# Altium PCB DM0250.PcbDoc (part 1 of 2)
Units mm, origin at the board's own origin, x right, y up, seen from the top; angles counter-clockwise.
Board outline 25 x 23.86 mm, 4 copper layers (Top Copper, Signal Layer 1, Layer 1, Bottom Layer), stack 1.602 mm thick; 45 components, 21 nets, 142 pads, 71 vias.
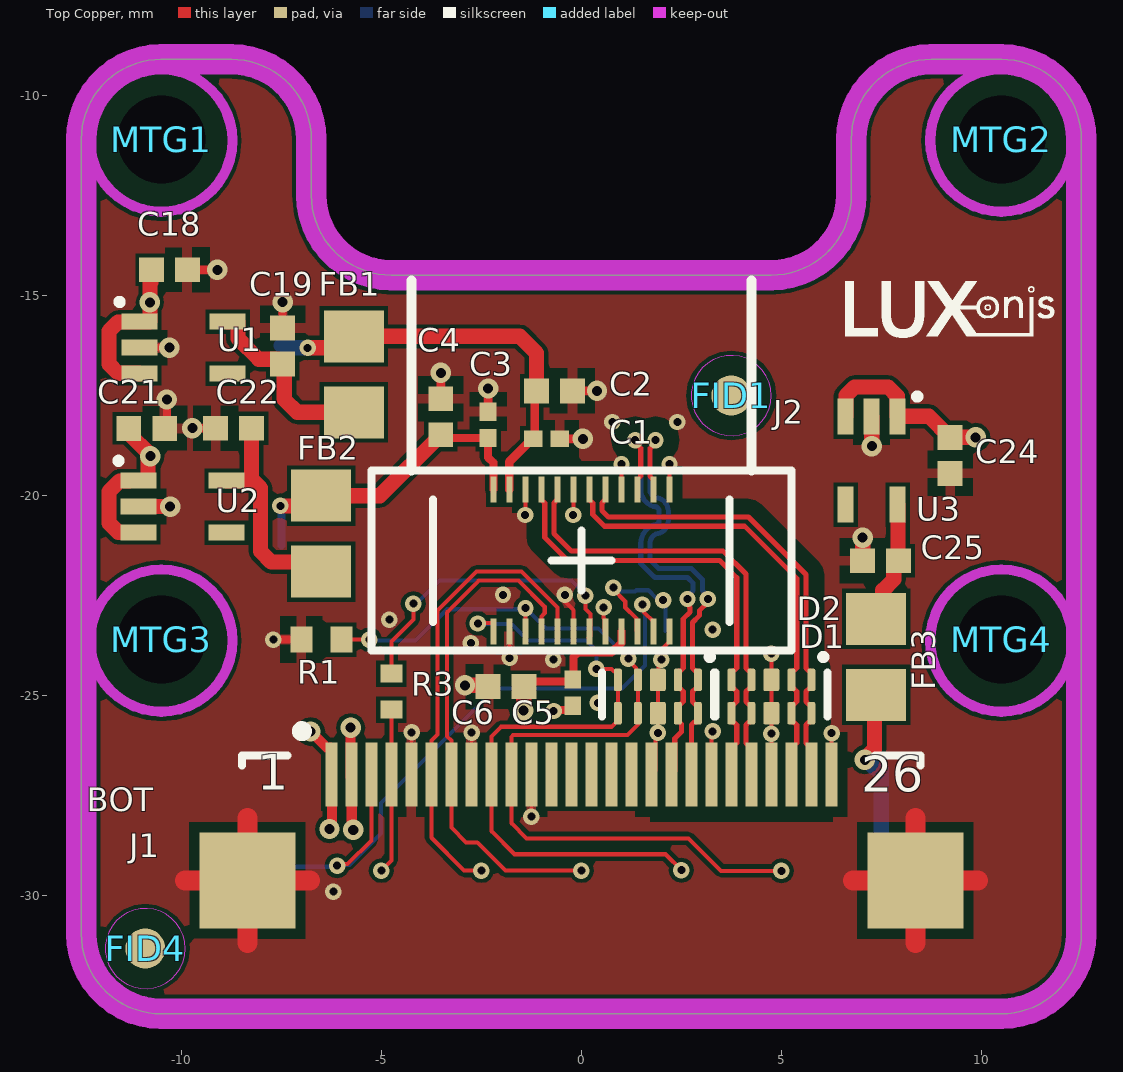
[diagram p0: Top Copper view]
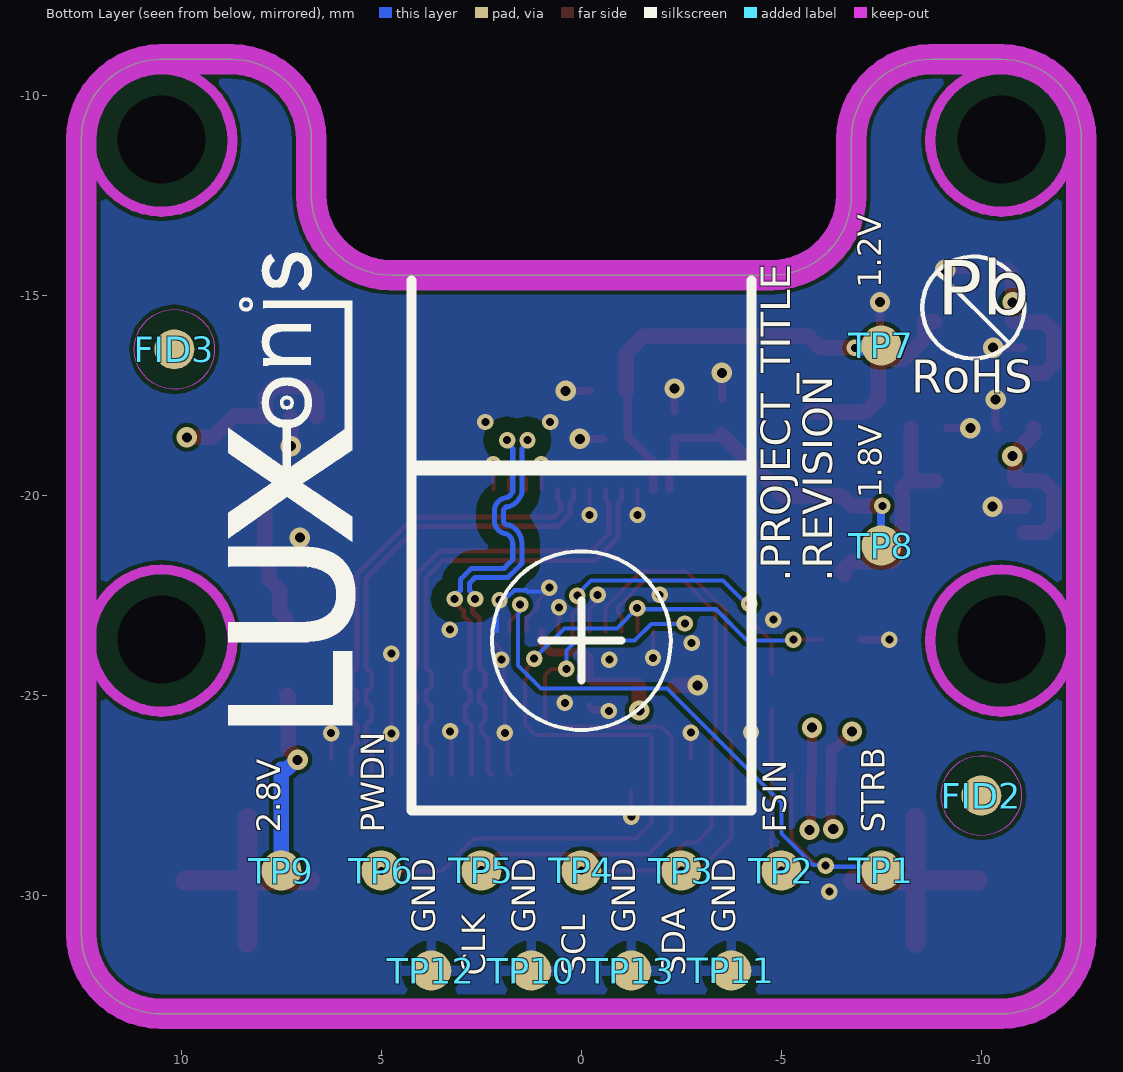
[diagram p1: Bottom Layer view, seen from below]
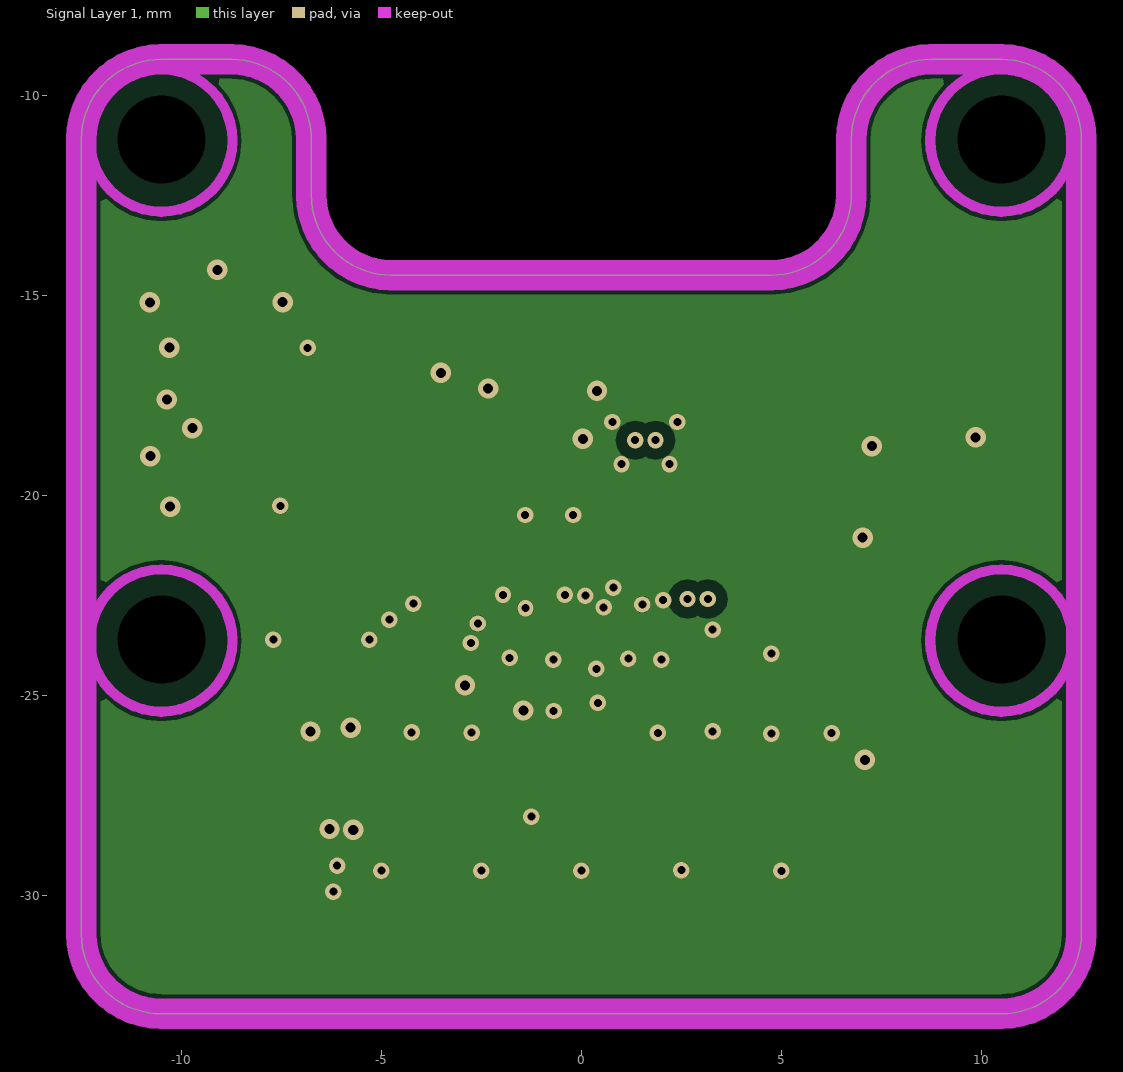
[diagram p2: Signal Layer 1]
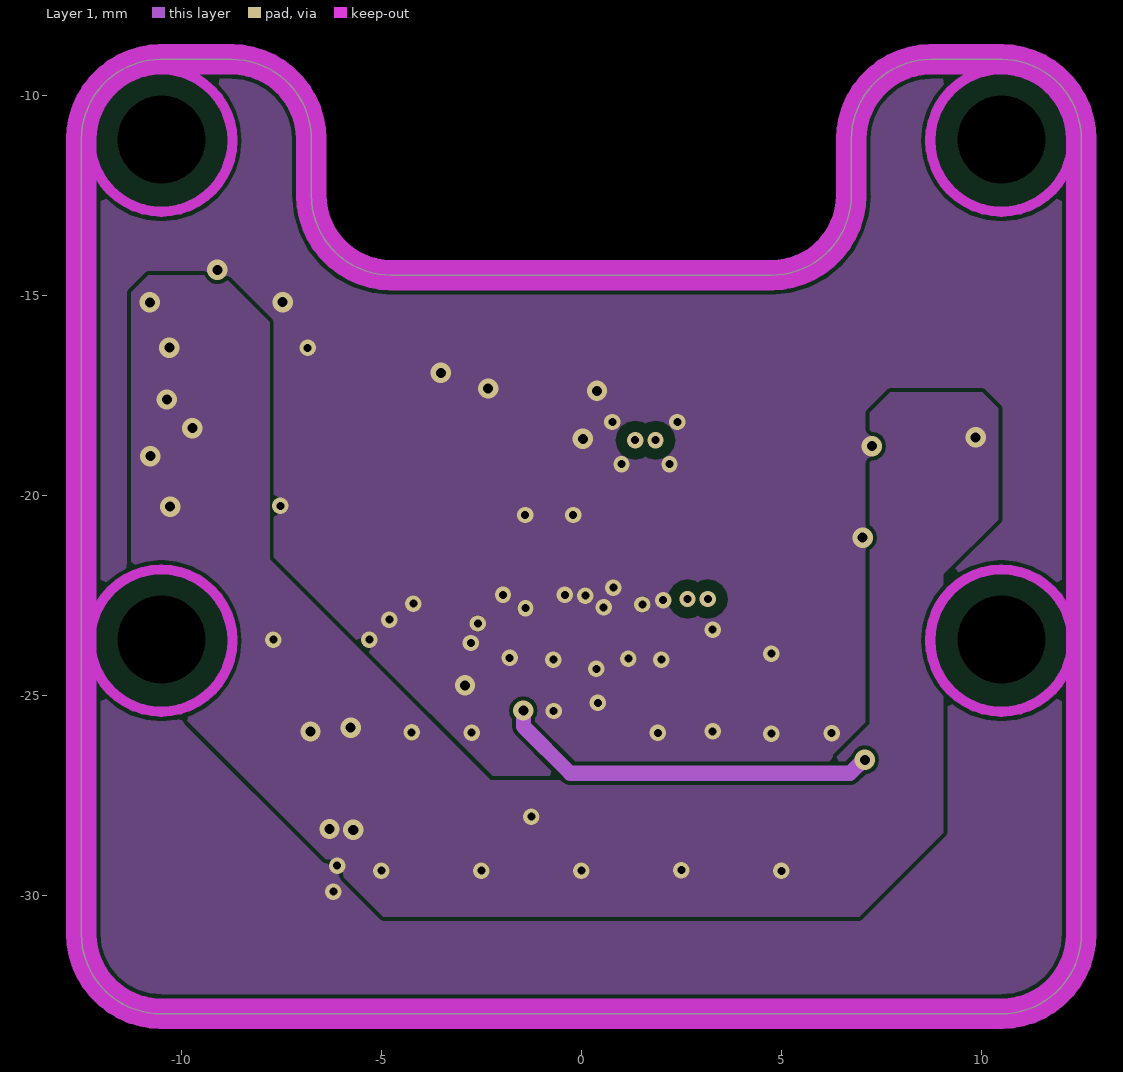
[diagram p3: Layer 1]

## Layer stack, top to bottom
Top Mask: solder mask 0.018, Solder Resist, Dk 4.2
Top Copper: signal copper 0.0356
Dielectric 1: prepreg 0.18, PP-021, Dk 4.2
Signal Layer 1: signal copper 0.0356
Core: core 1.1, Core-042, Dk 4.2
Layer 1: signal copper 0.0356
Dielectric 2: prepreg 0.18, PP-021, Dk 4.2
Bottom Layer: signal copper 0.0356
Bottom Solder: solder mask 0.018, Solder Resist, Dk 4.2

## Board outline
-12.5,-30.956 ccw(c-10.5,-30.956) -10.5,-32.956 10.5,-32.956 ccw(c10.5,-30.956) 12.5,-30.956 12.5,-11.1 12.5,-11.094 ccw(c10.5,-11.094) 10.5,-9.094 8.745,-9.094 8.75,-9.094 ccw(c8.75,-11.094) 6.75,-11.094 6.75,-12.49 cw(c4.75,-12.49) 4.75,-14.49 -4.75,-14.49 cw(c-4.75,-12.49) -6.75,-12.49 -6.75,-11.094 ccw(c-8.75,-11.094) -8.75,-9.094 -8.745,-9.094 -10.5,-9.094 ccw(c-10.5,-11.094) -12.5,-11.094

## Design rules (kind name [scope] priority, off if disabled: settings)
AssemblyTestPointUsage [All] p1: valid=2
AssemblyTestpoint [(IsPad And (OnTopLayer Or OnBottomLayer)) Or (IsVia) Or (IsPad And OnMultiLayer)] p1: testpointundercomponent=FALSE minsize=0.381 maxsize=2.54 preferedsize=1.524 minholesize=0 maxholesize=2.54 preferedholesize=0.813 testpointgrid=0.025 usegrid=FALSE gridtolerance=0 allowsidebottom=TRUE
BoardOutlineClearance [not InPolygonClass('ToEdge')] p1: gap=0.381 ignorepadtopadclearanceinfootprint=FALSE
Clearance DIFF_PAIR_GND [InPolygon vs InAnyDifferentialPair] p1: gap=0.381 ignorepadtopadclearanceinfootprint=FALSE
Clearance [All] p2: gap=0.1 ignorepadtopadclearanceinfootprint=FALSE
ComponentClearance [HasFootprint('FIDUCIAL_ROUND_1MM') or HasFootprint('TP100_200_NS') vs HasFootprint('FIDUCIAL_ROUND_1MM') or HasFootprint('TP100_200_NS')] p1: gap=-0.003 collisioncheckmode=3 verticalgap=2540 showdistances=FALSE
DiffPairsRouting 90ohm [InDifferentialPairClass('USB3')] p1: maxlimit=0.254 minlimit=0.102 mostfreqgap=0.254 toplayer_maxgap=0.102 toplayer_prefgap=0.102 toplayer_minwidth=0.178 toplayer_maxwidth=0.178 toplayer_prefwidth=0.178 midlayer1_minwidth=0.381 midlayer1_maxwidth=0.381 midlayer1_prefwidth=0.381 midlayer2_minwidth=0.381 midlayer2_maxwidth=0.381 midlayer2_prefwidth=0.381 bottomlayer_maxgap=0.102 bottomlayer_prefgap=0.102 bottomlayer_minwidth=0.178 bottomlayer_maxwidth=0.178 bottomlayer_prefwidth=0.178 impedanceprofiledriven=TRUE impedanceprofileid={88523433-C968-46F5-BAB2-5A945F0074AC} maxuncoupledlength=12.7
DiffPairsRouting 100ohm [InDifferentialPairClass('100ohm')] p2: maxlimit=0.254 minlimit=0.102 mostfreqgap=0.254 toplayer_maxgap=0.102 toplayer_prefgap=0.102 toplayer_minwidth=0.127 toplayer_maxwidth=0.127 toplayer_prefwidth=0.127 midlayer1_minwidth=0.381 midlayer1_maxwidth=0.381 midlayer1_prefwidth=0.381 midlayer2_minwidth=0.381 midlayer2_maxwidth=0.381 midlayer2_prefwidth=0.381 bottomlayer_maxgap=0.102 bottomlayer_prefgap=0.102 bottomlayer_minwidth=0.127 bottomlayer_maxwidth=0.127 bottomlayer_prefwidth=0.127 impedanceprofiledriven=TRUE impedanceprofileid={23EE4AC3-2669-4576-8364-9EC6BF9A4921} maxuncoupledlength=12.7
FabricationTestPointUsage [All] p1: valid=2 allowmultiple=TRUE
FabricationTestpoint [(IsPad And (OnTopLayer Or OnBottomLayer)) Or (IsVia) Or (IsPad And OnMultiLayer)] p1: side=3 testpointundercomponent=TRUE minsize=0.508 maxsize=2.54 preferedsize=1.524 minholesize=0 maxholesize=1.016 preferedholesize=0.813 testpointgrid=0.025 allowsidetop=TRUE allowsidebottom=TRUE usegrid=FALSE gridtolerance=0
HoleSize [All] p1: absolutevalues=TRUE maxlimit=25.4 minlimit=0.2 maxpercent=80.000 minpercent=20.000
HoleToHoleClearance [All] p1: gap=0.254 allowstackedmicrovias=FALSE
MatchedLengths "Schematic Matched Net Lengths_1" [InNetClass('SENSOR1MIPI')] p1: tolerance=0.127 checknetsindiffpair=TRUE checkdiffpairvsdiffpair=FALSE checkxsignals=FALSE checkothers=FALSE usedelayunits=TRUE delaytolerance=0.500000
MatchedLengths "Schematic Matched Net Lengths" [InNetClass('SENSOR1MIPI')] p2: tolerance=0.025 checknetsindiffpair=FALSE checkdiffpairvsdiffpair=TRUE checkxsignals=TRUE checkothers=TRUE usedelayunits=TRUE delaytolerance=1.000000
MinimumSolderMaskSliver [not (HasFootprint('DF40HC-3.0-100DS-0.4V_minpad') or HasFootprint('TPD4E02B04DQAR') or HasFootprint('105450-0101'))] p1: minsoldermaskwidth=0.076
PolygonConnect [All] p1: thpad.connectstyle=Direct thpad.reliefconductorwidth=0.254 thpad.reliefentries=4 thpad.polygonreliefangle="90 Angle" thpad.airgapwidth=0.254 smdpad.connectstyle=Relief smdpad.reliefconductorwidth=0.254 smdpad.reliefentries=4 smdpad.polygonreliefangle="90 Angle" smdpad.airgapwidth=0.254 via.connectstyle=Direct via.reliefconductorwidth=0.254 via.reliefentries=4 via.polygonreliefangle="90 Angle" via.airgapwidth=0.254
RoutingVias [All] p1: holewidth=0.254 width=0.508 viastyle="Through Hole" minholewidth=0.2 minwidth=0.4 maxholewidth=25.4 maxwidth=25.4
SilkToSilkClearance [All] p1: silktosilkclearance=0.025
SilkToSolderMaskClearance [InPadClass('All Pads')] p1: minsilkscreentomaskgap=0 clearancetoexposedcopper=FALSE
SolderMaskExpansion [All] p1: expansion=0.102 istentingtop=FALSE
UnRoutedNet [All] p1: checkbadconnections=TRUE
Width [All] p1: maxlimit=1 minlimit=0.102 preferedwidth=0.254
18 further rules are at their usual default settings.

## Classes and differential pairs
net class SENSOR1MIPI: CAM1_C_N CAM1_C_P CAM1_D0_N CAM1_D0_P CAM1_D1_N CAM1_D1_P
component class DM0250_Power: C18 C19 C21 C22 C24 C25 FB1 FB2 FB3 TP7 TP8 TP9 TP10 TP11 TP12 TP13 U1 U2 U3
component class DM0250_OV9282: C1 C2 C3 C4 C5 C6 D1 D2 FID1 FID2 FID3 FID4 J1 J2 MTG1 MTG2 MTG3 MTG4 R1 R3 TP1 TP2 TP3 TP4 TP5 TP6
differential pair CAM1_D1: +CAM1_D1_P -CAM1_D1_N
differential pair CAM1_D0: +CAM1_D0_P -CAM1_D0_N
differential pair CAM1_C: +CAM1_C_P -CAM1_C_N

## Components (designator, comment, footprint, x,y, rotation, side; value= is the part's Value field where it differs from the comment)
C1 "0.1uF 0201" CAPC0201(0603)33_N -0.872,-18.58 r180 top
C2 "10uF 0402" CAPC0402(1005)70_N -0.672,-17.383 r180 top
C3 "0.1uF 0201" CAPC0201(0603)33_N -2.33,-18.23 r270 top
C4 "10uF 0402" CAPC0402(1005)70_N -3.512,-18.03 r270 top
C5 "0.1uF 0201" CAPC0201(0603)33_N -0.212,-24.927 r90 top
C6 "10uF 0402" CAPC0402(1005)70_N -1.88,-24.775 r0 top
C18 "10uF 0402" CAPC0402(1005)70_N -10.297,-14.355 r180 top
C19 "10uF 0402" CAPC0402(1005)70_N -7.468,-16.262 r270 top
C21 "10uF 0402" CAPC0402(1005)70_N -10.865,-18.32 r180 top
C22 "10uF 0402" CAPC0402(1005)70_N -8.692,-18.315 r0 top
C24 "10uF 0402" CAPC0402(1005)70_N 9.22,-18.995 r90 top
C25 "10uF 0402" CAPC0402(1005)70_N 7.48,-21.628 r0 top
D1 "TPD4E02B04DQAR" TPD4E02B04DQAR 4.75,-25.025 r180 top
D2 "TPD4E02B04DQAR" TPD4E02B04DQAR 1.913,-25.025 r180 top
FB1 "600R/100MHz" 2508056017Y2 -5.685,-16.97 r90 top
FB2 "600R/100MHz" 2508056017Y2 -6.508,-20.953 r90 top
FB3 "600R/100MHz" 2508056017Y2 7.368,-24.03 r270 top
FID1 "FIDUCIAL_ROUND_1MM" FIDUCIAL_ROUND_1MM 3.75,-17.5 r0 top
FID2 "FIDUCIAL_ROUND_1MM" FIDUCIAL_ROUND_1MM -10,-27.5 r90 bottom
FID3 "FIDUCIAL_ROUND_1MM" FIDUCIAL_ROUND_1MM 10.174,-16.345 r90 bottom
FID4 "FIDUCIAL_ROUND_1MM" FIDUCIAL_ROUND_1MM -10.9,-31.325 r90 top
J1 "FLEX CONNECTOR, 0.50MM PITCH, HE" F32R-1A7H1-11026 0,-28.201 r0 top
J2 "BBR43-24KB533 for camera module TG161B-201" "TG161B-201 / AN01V32 - Board Wrap" 0,-21.625 r180 top locked
MTG1 "" MOUNTING_HOLE_M2_RPI_CAM -10.5,-11.094 r90 top locked
MTG2 "" MOUNTING_HOLE_M2_RPI_CAM 10.5,-11.094 r90 top locked
MTG3 "" MOUNTING_HOLE_M2_RPI_CAM -10.5,-23.594 r90 top locked
MTG4 "" MOUNTING_HOLE_M2_RPI_CAM 10.5,-23.594 r90 top locked
R1 "10K 0402" RESC0402(1005)_N -6.5,-23.6 r180 top
R3 "0R 0402" RESC0402(1005)_L -4.75,-24.901 r270 top
TP1 "TP100_150_NS" TP100_150_NS -7.5,-29.375 r180 bottom
TP2 "TP100_150_NS" TP100_150_NS -5,-29.375 r90 bottom
TP3 "TP100_150_NS" TP100_150_NS -2.5,-29.375 r90 bottom
TP4 "TP100_150_NS" TP100_150_NS 0,-29.375 r90 bottom
TP5 "TP100_150_NS" TP100_150_NS 2.5,-29.375 r90 bottom
TP6 "TP100_150_NS" TP100_150_NS 5,-29.375 r90 bottom
TP7 "TP100_150_NS" TP100_150_NS -7.5,-16.25 r270 bottom
TP8 "TP100_150_NS" TP100_150_NS -7.5,-21.25 r180 bottom
TP9 "TP100_150_NS" TP100_150_NS 7.5,-29.375 r180 bottom
TP10 "TP100_150_NS" TP100_150_NS 1.25,-31.875 r90 bottom
TP11 "TP100_150_NS" TP100_150_NS -3.75,-31.875 r90 bottom
TP12 "TP100_150_NS" TP100_150_NS 3.75,-31.875 r90 bottom
TP13 "TP100_150_NS" TP100_150_NS -1.25,-31.875 r90 bottom
U1 "TLV70012DCK" TLV70012DCK -9.945,-16.302 r270 top
U2 "TLV70018DCK" TLV70018DCK -9.97,-20.275 r270 top
U3 "TLV70028DCK" TLV70028DCK 7.255,-19.128 r180 top

## Footprints (in the part's own frame and the unit in brackets; to place one, negate y for a bottom-side part, rotate by r counter-clockwise, add the part's x,y. Pads: shape width x height; smd on the part's side, far side on the other; paste and mask are expansions set on the pad)
2508056017Y2 [mm] "2508056017Y2 Chip Inductor, 2-Leads, Body 2.00x1.25mm"
  rect 1.3x1.5 smd: 1(-0.95,0) 2(0.95,0)
  body extent -1.1,-0.72 1.1,0.73, height 1.45
CAPC0201(0603)33_N [mm] "Chip Capacitor, Body 0.6x0.3mm, Height 0.33mm, IPC Medium Density"
  rect 0.46x0.42 smd: 1(-0.33,0) 2(0.33,0)
  body extent -0.31,-0.16 0.32,0.17, height 0.33
CAPC0402(1005)70_N [mm] "Chip Capacitor, Body 1.0x0.5mm, Height 0.7mm, IPC Medium Density"
  rect 0.62x0.62 smd: 1(-0.45,0) 2(0.45,0)
  body extent -0.55,-0.3 0.55,0.3, height 0.7
F32R-1A7H1-11026 [mm] "26pin Molex FFC 0.5mm Bottom"
  rect 0.3x1.6 smd: 1(-6.25,1.225) 2(-5.75,1.225) 3(-5.25,1.225) 4(-4.75,1.225) 5(-4.25,1.225) 6(-3.75,1.225) 7(-3.25,1.225) 8(-2.75,1.225) 9(-2.25,1.225) 10(-1.75,1.225) 11(-1.25,1.225) 12(-0.75,1.225) 13(-0.25,1.225) 14(0.25,1.225) 15(0.75,1.225) 16(1.25,1.225) 17(1.75,1.225) 18(2.25,1.225) 19(2.75,1.225) 20(3.25,1.225) 21(3.75,1.225) 22(4.25,1.225) 23(4.75,1.225) 24(5.25,1.225) 25(5.75,1.225) 26(6.25,1.225)
  rect 2.4x2.4 smd: MP1(-8.35,-1.425) MP2(8.35,-1.425)
  silkscreen extent -8.49,1.45 8.49,2.44, body extent -10.16,-4.47 10.14,1.03, height 15.15
FIDUCIAL_ROUND_1MM [mm] "Round, 1mm dia"
  round 1 smd paste-1 mask+0.5: 1(0,0)
  Top Copper keep-out circle w0.025: c0,0 r1
MOUNTING_HOLE_M2_RPI_CAM [mil] "NPTH 2.2mm Hole Used in Raspberry Pi Camera"
  round 60 hole 86.61 unplated: 1(0,0)
RESC0402(1005)_L [mm] "Chip Resistor, Body 1.0x0.5mm, IPC High Density"
  rect 0.45x0.55 smd: 1(-0.45,0) 2(0.45,0)
  body extent -0.52,-0.27 0.53,0.28, height 0.4
RESC0402(1005)_N [mm] "Chip Resistor, Body 1.0x0.5mm, IPC Medium Density"
  rect 0.55x0.65 smd: 1(-0.5,0) 2(0.5,0)
  body extent -0.52,-0.27 0.53,0.28, height 0.4
"TG161B-201 / AN01V32 - Board Wrap" [mm] "SMT connector: BBR43-24KB533"
  rect 0.15x0.65 smd mask+0.05: 1(2.2,-1.775) 2(1.8,-1.775) 3(1.4,-1.775) 4(1,-1.775) 5(0.6,-1.775) 6(0.2,-1.775) 7(-0.2,-1.775) 8(-0.6,-1.775) 9(-1,-1.775) 10(-1.4,-1.775) 11(-1.8,-1.775) 12(-2.2,-1.775) 13(-2.2,1.775) 14(-1.8,1.775) 15(-1.4,1.775) 16(-1,1.775) 17(-0.6,1.775) 18(-0.2,1.775) 19(0.2,1.775) 20(0.6,1.775) 21(1,1.775) 22(1.4,1.775) 23(1.8,1.775) 24(2.2,1.775)
  silkscreen extent -5.25,-7 5.25,2.25, body extent -5.25,-8.41 5.25,6.25, height 4.4
TLV70012DCK [mm] "SC70-5 1.1mm"
  rect 0.4x0.9 smd paste-0.025 mask+0.05: 1(-0.65,-1.1) 2(0,-1.1) 3(0.65,-1.1) 4(0.65,1.1) 5(-0.65,1.1)
  silkscreen extent -1.17,-1.63 -1.12,-1.57, body extent -1.1,-1.2 1.1,1.2, height 1.1
TLV70018DCK [mm] "SC70-5 1.1mm"
  rect 0.4x0.9 smd paste-0.025 mask+0.05: 1(-0.65,-1.1) 2(0,-1.1) 3(0.65,-1.1) 4(0.65,1.1) 5(-0.65,1.1)
  silkscreen extent -1.17,-1.63 -1.12,-1.57, body extent -1.1,-1.2 1.1,1.2, height 1.1
TLV70028DCK [mm] "SC70-5 1.1mm"
  rect 0.4x0.9 smd paste-0.025 mask+0.05: 1(-0.65,-1.1) 2(0,-1.1) 3(0.65,-1.1) 4(0.65,1.1) 5(-0.65,1.1)
  silkscreen extent -1.17,-1.63 -1.12,-1.57, body extent -1.1,-1.2 1.1,1.2, height 1.1
TP100_150_NS [mm] "1mm dia pad, 1.5mm clearance, no silk screen"
  round 1 smd paste-2: 1(0,0)
TPD4E02B04DQAR [mm] "TPD4E02B04DQAR"
  rrect50% 0.2x0.565 smd mask+0.07: 1(-1,-0.417) 2(-0.5,-0.417) 4(0.5,-0.417) 5(1,-0.417) 6(1,0.417) 7(0.5,0.417) 9(-0.5,0.417) 10(-1,0.417)
  rrect25% 0.4x0.565 smd mask+0.07: 3(0,-0.417) 8(0,0.417)
  silkscreen extent -1.4,-1.01 1.4,0.5, body extent -1.2,-0.71 1.2,0.71, height 0.55

## Part data
C1 C3 C5: library part GRM033R61A104KE15D, "CAP CER 0.1UF 10V X5R 0201", Capacitance=100nF, Case Code (Imperial)=0201, Case Code (Metric)=0603, Dielectric=X5R, Manufacturer 1=Murata, Max Operating Temperature=85°C, Min Operating Temperature=-55°C, Package Quantity=1, Supplier Part Number 1=490-5881-1-ND, Tolerance=10%, Voltage=10V, Case/Package=0201, ComponentLink1Description=https://datasheet.ciiva.com/26843/getdatasheetpartid-308656-26843739.pdf?src-supplier=Verical, ComponentLink1URL=https://datasheet.ciiva.com/26843/getdatasheetpartid-308656-26843739.pdf?src-supplier=Verical, ComponentLink2Description=https://datasheet.ciiva.com/5413/product-5413117.pdf?src-supplier=Mouser, ComponentLink2URL=https://datasheet.ciiva.com/5413/product-5413117.pdf?src-supplier=Mouser, ComponentLink3Description=https://datasheet.ciiva.com/6256/partnumbering-e-01-6256406.pdf?src-supplier=Digi-Key, ComponentLink3URL=https://datasheet.ciiva.com/6256/partnumbering-e-01-6256406.pdf?src-supplier=Digi-Key, ComponentLink4Description=https://datasheet.ciiva.com/6256/partnumbering-e-01-6256407.pdf?src-supplier=Digi-Key, ComponentLink4URL=https://datasheet.ciiva.com/6256/partnumbering-e-01-6256407.pdf?src-supplier=Digi-Key, ComponentLink5Description=https://datasheet.ciiva.com/6256/partnumbering-e-01-6256408.pdf?src-supplier=Digi-Key, ComponentLink5URL=https://datasheet.ciiva.com/6256/partnumbering-e-01-6256408.pdf?src-supplier=Digi-Key, Depth=0.3mm, Height=0.3mm, Lead Free="Lead Free", Length=0.6mm, Manufacturer Part Number 1=GRM033R61A104KE15D, Mount="Surface Mount", Packaging="Tape and Reel", Pricing 1="1=0.10000, 10=0.04200, 100=0.01860, 500=0.01330, 1000=0.01045, 2500=0.00950, 5000=0.00874 (USD)", Radiation Hardening=No, REACH SVHC="No SVHC", RoHS=Yes, Stock 1=45335312, Supplier 1=Digi-Key, Termination=SMD/SMT, Thickness=0.013inch, Voltage Rating=10V, Voltage Rating (DC)=10V, Weight=6E-06oz, Width=0.012inch
C2 C4 C6 C18 C19 C21 C22 C24 C25: library part GRM155R60J106ME15D, "CAP CER 10UF 6.3V X5R 0402 20%", Capacitance=10uF, Case Code (Imperial)=0402, Case Code (Metric)=1005, Dielectric=X5R, Manufacturer 1=Murata, Max Operating Temperature=85°C, Min Operating Temperature=-55°C, Supplier Part Number 1=490-13238-1-ND, Tolerance=20%, Voltage Rating=6.3V, Case/Package=0402, ComponentLink1Description=https://www.murata.com/~/media/webrenewal/support/library/catalog/products/capacitor/mlcc/c02e.ashx?la=en-us&src-supplier=Digi-Key, ComponentLink1URL=https://www.murata.com/~/media/webrenewal/support/library/catalog/products/capacitor/mlcc/c02e.ashx?la=en-us&src-supplier=Digi-Key, Length=0.039inch, Manufacturer Part Number 1=GRM155R60J106ME15D, Mount="Surface Mount", Packaging="Tape and Reel", Pricing 1="1=0.23000, 10=0.15700, 100=0.07950, 500=0.05442, 1000=0.04814, 2500=0.04605, 5000=0.04186 (USD)", RoHS=Yes, Stock 1=1839627, Supplier 1=Digi-Key, Thickness=0.026inch, Voltage Rating (DC)=6.3V, Width=0.02inch
D1 D2: "TVS DIODE 3.6V 8.8V 10USON 8.8V (Typ) Clamp 5A (8/20µs) Ipp Tvs Diode Surface Mount 10-USON (2.5x1)", Clamping Voltage=8.8V, Manufacturer 1="Texas Instruments", Max Operating Temperature=125°C, Min Breakdown Voltage=5.5V, Min Operating Temperature=-40°C, Operating Supply Voltage=3.6V, Peak Pulse Current=5A, Peak Pulse Power=17W, Power Line Protection=No, Supplier Part Number 1=296-43875-1-ND, ComponentLink1Description=http://www.ti.com/general/docs/lit/getliterature.tsp?genericPartNumber=TPD4E02B04&amp;&amp;fileType=pdf&src-supplier=Element14, ComponentLink1URL=http://www.ti.com/general/docs/lit/getliterature.tsp?genericPartNumber=TPD4E02B04&amp;&amp;fileType=pdf&src-supplier=Element14, ComponentLink2Description=http://www.ti.com/lit/ds/symlink/tpd4e02b04.pdf?src-supplier=Farnell, ComponentLink2URL=http://www.ti.com/lit/ds/symlink/tpd4e02b04.pdf?src-supplier=Farnell, ComponentLink3Description=http://www.ti.com/lit/ds/symlink/tpd4e02b04.pdf?src-supplier=Newark, ComponentLink3URL=http://www.ti.com/lit/ds/symlink/tpd4e02b04.pdf?src-supplier=Newark, ComponentLink4Description=http://www.ti.com/lit/ds/symlink/tpd4e02b04.pdf?src-supplier=Digi-Key, ComponentLink4URL=http://www.ti.com/lit/ds/symlink/tpd4e02b04.pdf?src-supplier=Digi-Key, Composition=Zener, Interface=USB,HDMI, Lead Free="Lead Free", Manufacturer Part Number 1=TPD4E02B04DQAR, Mount="Surface Mount", Number of Bidirectional Channels=4, Number of Channels=4, Number of Pins=10, Packaging="Cut Tape", Pricing 1="1=0.69000, 10=0.60800, 100=0.46650, 500=0.36874, 1000=0.29499 (USD)", REACH SVHC="No SVHC", Reverse Standoff Voltage=3.6V, RoHS=Yes, Stock 1=25615, Supplier 1=Digi-Key
FB1 FB2 FB3: library part 2508056017Y2, "FERRITE BEAD, 0.1OHM, 2A, 0805, 600R/100MHz", Case Code (Imperial)=0805, Case Code (Metric)=2012, Current Rating=2A, DC Resistance (DCR)=100mR, Frequency=100MHz, Manufacturer 1=Fair-Rite, Max Operating Temperature=125°C, Min Operating Temperature=-55°C, Package Quantity=4000, Resistance=350mR, Supplier Part Number 1=1934-1487-1-ND, Tolerance=25%, Case/Package=0805, ComponentLink1Description=https://datasheet.ciiva.com/3854/3802508056017y2-3854245.pdf?src-supplier=Arrow, ComponentLink1URL=https://datasheet.ciiva.com/3854/3802508056017y2-3854245.pdf?src-supplier=Arrow, ComponentLink2Description=https://datasheet.ciiva.com/22735/652149-22735047.pdf?src-supplier=Element14, ComponentLink2URL=https://datasheet.ciiva.com/22735/652149-22735047.pdf?src-supplier=Element14, ComponentLink3Description=https://datasheet.ciiva.com/1127/26143-1127514.pdf?src-supplier=Farnell, ComponentLink3URL=https://datasheet.ciiva.com/1127/26143-1127514.pdf?src-supplier=Farnell, ComponentLink4Description=https://datasheet.ciiva.com/18090/getdatasheetpartid-212640-18090187.pdf?src-supplier=Verical, ComponentLink4URL=https://datasheet.ciiva.com/18090/getdatasheetpartid-212640-18090187.pdf?src-supplier=Verical, ComponentLink5Description=https://datasheet.ciiva.com/7620/26143-7620140.pdf?src-supplier=Element14, ComponentLink5URL=https://datasheet.ciiva.com/7620/26143-7620140.pdf?src-supplier=Element14, DC Current=2A, Depth=1.25mm, Height=0.9mm, Impedance=600R, Length=2mm, Manufacturer Part Number 1=2508056017Y2, Max DC Current=2A, Military Standard=Not, Number of Pins=2, Packaging="Tape and Reel", Pricing 1="1=0.10000, 10=0.07900, 25=0.07120, 50=0.05240, 100=0.04520, 250=0.03568, 500=0.03014, 1000=0.02538 (USD)", Radiation Hardening=No, REACH SVHC="No SVHC", RoHS=Yes, Stock 1=100491, Supplier 1=Digi-Key, Termination=SMD/SMT, Test Frequency=100MHz, Width=1.25mm
FID1 FID2 FID3 FID4: library part FIDUCIAL, "Fiducial with various available footprints"
J1: library part F32R-1A7H1-11026, "26 Position FFC, FPC Connector Contacts, Bottom 0.020\" (0.50mm) Surface Mount, Right Angle", Current Rating=500mA, Flammability Rating="UL94 V-0", Manufacturer 1="Amphenol ICC (FCI)", Max Operating Temperature=105°C, Min Operating Temperature=-40°C, Voltage Rating=50V, Category=Connectors, ComponentLink1Description=https://cdn.amphenol-icc.com/media/wysiwyg/files/drawing/f32r-f32j.pdf, ComponentLink1URL=https://cdn.amphenol-icc.com/media/wysiwyg/files/drawing/f32r-f32j.pdf, Contact Material=Bronze, Contact Plating=Tin, Manufacturer Part Number 1=F32R-1A7H1-11026, Mount="Surface Mount", Number of Positions=26, Packaging="Tape and Reel", Pitch=0.02inch, Pricing 1="1=0.77, 10=0.721, 100=0.5529, 500=0.4808 (USD)", RoHS=Yes, Stock 1=1709, Supplier 1=Digi-Key, Termination=Solder
J2: library part TG161B-201_Connector, "CONN 24 way, 2 row board to board connector SMD", Manufacturer 1=ACON, Manufacturer Part Number 1=BBR43-24KB533, RoHS=Yes, Supplier 1=Digsemi, Supplier Part Number 1=BBR43-24KB533
MTG1 MTG2 MTG3 MTG4: "=CurrentFootprint", B - Value="Not a Part", A - Level=0
R1: library part RC0402FR-1310KL, "RES SMD 10K OHM 1% 0402 1/16W Chip Resistor, 0402 [1005 Metric], 10 kohm, RC Series, 50 V, Thick Film, 62.5 mW", Case Code (Imperial)=0402, Case Code (Metric)=1005, Manufacturer 1=Yageo, Max Operating Temperature=155°C, Min Operating Temperature=-55°C, Power Rating=62.5mW, Resistance=10kR, Supplier Part Number 1=67R9960, Temperature Coefficient=100ppm/°C, Tolerance=1%, Voltage Rating=50V, Case/Package=0402, ComponentLink1Description=https://datasheet.ciiva.com/16940/pyu-rc0402-51-rohs-l-6-16940293.pdf?src-supplier=Avnet+Europe, ComponentLink1URL=https://datasheet.ciiva.com/16940/pyu-rc0402-51-rohs-l-6-16940293.pdf?src-supplier=Avnet+Europe, ComponentLink2Description=https://datasheet.ciiva.com/28386/pyu-rc0402-51-rohs-l-6-28386855.pdf?src-supplier=Avnet+Europe, ComponentLink2URL=https://datasheet.ciiva.com/28386/pyu-rc0402-51-rohs-l-6-28386855.pdf?src-supplier=Avnet+Europe, ComponentLink3Description=https://datasheet.ciiva.com/16740/pyu-rc0402-51-rohs-l-6-r-16740602.pdf?src-supplier=Future+Electronics, ComponentLink3URL=https://datasheet.ciiva.com/16740/pyu-rc0402-51-rohs-l-6-r-16740602.pdf?src-supplier=Future+Electronics, ComponentLink4Description=https://datasheet.ciiva.com/8891/pyu-rc0402-51-rohs-l-6-8891339.pdf?src-supplier=Avnet, ComponentLink4URL=https://datasheet.ciiva.com/8891/pyu-rc0402-51-rohs-l-6-8891339.pdf?src-supplier=Avnet, ComponentLink5Description=https://datasheet.ciiva.com/5557/pyu-rc0402-51-rohs-l-6-r-5557997.pdf?src-supplier=Mouser, ComponentLink5URL=https://datasheet.ciiva.com/5557/pyu-rc0402-51-rohs-l-6-r-5557997.pdf?src-supplier=Mouser, ComponentLink6Description=https://datasheet.ciiva.com/7983/1018594-7983533.pdf?src-supplier=Element14, ComponentLink6URL=https://datasheet.ciiva.com/7983/1018594-7983533.pdf?src-supplier=Element14, Composition="Thick Film", Contact Plating=Tin,Matte,Lead, Depth=0.5mm, Lead Free="Lead Free", Length=1mm, Manufacturer Part Number 1=RC0402FR-1310KL, Military Standard=Not, Number of Pins=2, Number of Terminations=2, Packaging="Tape and Reel", Pricing 1="1=0.10000, 25=0.01200, 100=0.00400, 250=0.00400, 500=0.00300, 1000=0.00300 (USD)", Radiation Hardening=No, REACH SVHC="No SVHC", RoHS=Yes, Stock 1=62239, Supplier 1=Newark, Supplier 2="Future Electronics", Supplier 3=Mouser, Supplier 4=Element14, Supplier Part Number 2=RC0402FR-1310KL-CUTT, Supplier Part Number 3=603-RC0402FR-1310KL, Supplier Part Number 4=1799235, Termination=SMD/SMT, Voltage Rating (DC)=50V, Working Voltage=50V
R3: library part CRCW04020000Z0ED, "RES SMD 0 OHM JUMPER 1/16W 0402", Case Code (Imperial)=0402, Case Code (Metric)=1005, Manufacturer 1=Vishay, Max Operating Temperature=155°C, Max Power Dissipation=63mW, Min Operating Temperature=-55°C, Package Quantity=1, Resistance=0mR, Supplier Part Number 1=541-0.0JCT-ND, Temperature Coefficient=100ppm/°C, Tolerance=5%, Voltage Rating=50V, Case/Package=0402, ComponentLink1Description=https://datasheet.ciiva.com/3255/dcrcwe3-3255944.pdf?src-supplier=Avnet, ComponentLink1URL=https://datasheet.ciiva.com/3255/dcrcwe3-3255944.pdf?src-supplier=Avnet, ComponentLink2Description=https://datasheet.ciiva.com/3255/dcrcwe3-3255945.pdf?src-supplier=Avnet, ComponentLink2URL=https://datasheet.ciiva.com/3255/dcrcwe3-3255945.pdf?src-supplier=Avnet, ComponentLink3Description=https://datasheet.ciiva.com/16881/dcrcwe3-16881413.pdf?src-supplier=Avnet+Europe, ComponentLink3URL=https://datasheet.ciiva.com/16881/dcrcwe3-16881413.pdf?src-supplier=Avnet+Europe, ComponentLink4Description=https://datasheet.ciiva.com/2461/dcrcwe3-2461962.pdf?src-supplier=Digi-Key, ComponentLink4URL=https://datasheet.ciiva.com/2461/dcrcwe3-2461962.pdf?src-supplier=Digi-Key, ComponentLink5Description=https://datasheet.ciiva.com/7841/1720486-7841802.pdf?src-supplier=Element14, ComponentLink5URL=https://datasheet.ciiva.com/7841/1720486-7841802.pdf?src-supplier=Element14, ComponentLink6Description=https://datasheet.ciiva.com/2461/dcrcwe3-2461963.pdf?src-supplier=Digi-Key, ComponentLink6URL=https://datasheet.ciiva.com/2461/dcrcwe3-2461963.pdf?src-supplier=Digi-Key, ComponentLink7Description=https://datasheet.ciiva.com/2461/dcrcwe3-2461964.pdf?src-supplier=Digi-Key, ComponentLink7URL=https://datasheet.ciiva.com/2461/dcrcwe3-2461964.pdf?src-supplier=Digi-Key, ComponentLink8Description=https://datasheet.ciiva.com/7841/1697337-7841468.pdf?src-supplier=Element14, ComponentLink8URL=https://datasheet.ciiva.com/7841/1697337-7841468.pdf?src-supplier=Element14, ComponentLink9Description=https://datasheet.ciiva.com/16761/70200976-16761309.pdf?src-supplier=Allied+Electronics, ComponentLink9URL=https://datasheet.ciiva.com/16761/70200976-16761309.pdf?src-supplier=Allied+Electronics, ComponentLink10Description=https://datasheet.ciiva.com/26311/fld-crcw-e3-data-en-26311550.pdf?src-supplier=Distrelec, ComponentLink10URL=https://datasheet.ciiva.com/26311/fld-crcw-e3-data-en-26311550.pdf?src-supplier=Distrelec, Composition="Thick Film", Contact Plating=Tin, Depth=0.5mm, Features="Automotive AEC-Q200", Height=0.35mm, Lead Free="Lead Free", Length=1mm, Manufacturer Part Number 1=CRCW04020000Z0ED, Military Standard=Not, Mount="Surface Mount", Number of Terminations=2, Packaging="Tape and Reel", Power Rating=63mW, Pricing 1="1=0.10000, 10=0.03400, 25=0.02440, 50=0.01860, 100=0.01380, 250=0.01048, 500=0.00840, 1000=0.00618, 5000=0.00443 (USD)", Radiation Hardening=No, REACH SVHC=Unknown, RoHS=Yes, Stock 1=855968, Supplier 1=Digi-Key, Termination=SMD/SMT, Voltage Rating (DC)=50V, Weight=2.3E-05oz, Width=0.5mm
TP1 TP2 TP3 TP4 TP5 TP6 TP7 TP8 TP9 TP10 TP11 TP12 TP13: library part TEST_POINT
U1: "IC REG LINEAR 1.2V 200MA SC70-5", Case/Package=SC, Dropout Voltage=175mV, Manufacturer 1="Texas Instruments", Manufacturer Part Number 1=TLV70012DCKR, Manufacturer Part Number 2=TLV70012DCKT, Max Input Voltage=5.5V, Max Operating Temperature=125°C, Max Output Current=200mA, Max Output Voltage=1.2V, Max Power Dissipation=320mW, Min Current Limit=220mA, Min Input Voltage=2V, Min Operating Temperature=-40°C, Output Voltage Accuracy=2%, Package Quantity=1, Quiescent Current=30uA, Supplier Part Number 1=296-27438-1-ND, Accuracy=2%, ComponentLink1Description=https://datasheet.ciiva.com/26909/tlv70012dckr-26909420.pdf?src-supplier=IIIC, ComponentLink1URL=https://datasheet.ciiva.com/26909/tlv70012dckr-26909420.pdf?src-supplier=IIIC, ComponentLink2Description=https://datasheet.ciiva.com/46448/1836520-46448747.pdf?src-supplier=Element14, ComponentLink2URL=https://datasheet.ciiva.com/46448/1836520-46448747.pdf?src-supplier=Element14, ComponentLink3Description=http://components.arrow.com/part/dataview/48874348S9524109N7713?src-supplier=Arrow, ComponentLink3URL=http://components.arrow.com/part/dataview/48874348S9524109N7713?src-supplier=Arrow, ComponentLink4Description=http://components.arrow.com/part/dataview/0323_02210905?src-supplier=Arrow+Europe, ComponentLink4URL=http://components.arrow.com/part/dataview/0323_02210905?src-supplier=Arrow+Europe, ComponentLink5Description=http://www.ti.com/general/docs/lit/getliterature.tsp?genericPartNumber=TLV700&&fileType=pdf&src-supplier=Avnet, ComponentLink5URL=http://www.ti.com/general/docs/lit/getliterature.tsp?genericPartNumber=TLV700&&fileType=pdf&src-supplier=Avnet, ComponentLink6Description=http://focus.ti.com/lit/ds/symlink/tlv70033.pdf?src-supplier=Avnet, ComponentLink6URL=http://focus.ti.com/lit/ds/symlink/tlv70033.pdf?src-supplier=Avnet, ComponentLink7Description=http://www.ti.com/lit/ds/slvsa00e/slvsa00e.pdf?src-supplier=Digi-Key, ComponentLink7URL=http://www.ti.com/lit/ds/slvsa00e/slvsa00e.pdf?src-supplier=Digi-Key, ComponentLink8Description=http://www.ti.com/litv/slvsa00d?src-supplier=Mouser, ComponentLink8URL=http://www.ti.com/litv/slvsa00d?src-supplier=Mouser, Contact Plating=Gold, Lead Free="Lead Free", Manufacturer 2="Texas Instruments", Min Output Voltage=1.2V, Nominal Output Voltage=1.2V, Number of Outputs=1, Number of Pins=5, Number of Regulators=1, Output Current=200mA, Output Type=Fixed, Output Voltage=1.2V, Packaging="Tape and Reel", Polarity=Positive, Power Dissipation=320mW, Pricing 1="1=0.48000, 10=0.40900, 100=0.30570, 500=0.24020, 1000=0.18561 (USD)", Pricing 2="1=0.43000, 10=0.38000, 25=0.35000, 100=0.30000, 250=0.27000, 500=0.21000, 750=0.16000, 1000=0.14000 (USD)", Radiation Hardening=No, REACH SVHC="No SVHC", RoHS=Yes, Stock 1=8389, Stock 2=250, Supplier 1=Digi-Key, Supplier 2="TI store", Supplier Part Number 2=TLV70012DCKT
U2: "IC REG LINEAR 1.8V 200MA SC70-5 Linear Voltage Regulator IC  1 Output  200mA SC-70-5", Case/Package=SC, Dropout Voltage=175mV, Manufacturer 1="Texas Instruments", Manufacturer Part Number 1=TLV70018DCKR, Manufacturer Part Number 2=TLV70018DCKT, Max Input Voltage=5.5V, Max Operating Temperature=125°C, Max Output Current=200mA, Max Output Voltage=1.8V, Max Power Dissipation=320mW, Min Current Limit=220mA, Min Input Voltage=2V, Min Operating Temperature=-40°C, Nominal Supply Current=31uA, Output Voltage Accuracy=2%, Package Quantity=1, Quiescent Current=30uA, Supplier Part Number 1=296-32409-1-ND, Accuracy=2%, ComponentLink1Description=https://datasheet.ciiva.com/41462/001014631-da-01-en-ic-reg-ldo-1-8v-0-tlv70018dckr-sot-5-tid-41462480.pdf?src-supplier=Conrad, ComponentLink1URL=https://datasheet.ciiva.com/41462/001014631-da-01-en-ic-reg-ldo-1-8v-0-tlv70018dckr-sot-5-tid-41462480.pdf?src-supplier=Conrad, ComponentLink2Description=https://datasheet.ciiva.com/22700/1882059-22700171.pdf?src-supplier=Element14, ComponentLink2URL=https://datasheet.ciiva.com/22700/1882059-22700171.pdf?src-supplier=Element14, ComponentLink3Description=https://datasheet.ciiva.com/14149/tlv700-eng-ds-14149837.pdf?src-supplier=Distrelec, ComponentLink3URL=https://datasheet.ciiva.com/14149/tlv700-eng-ds-14149837.pdf?src-supplier=Distrelec, ComponentLink4Description=https://datasheet.ciiva.com/7992/1882059-7992894.pdf?src-supplier=Element14, ComponentLink4URL=https://datasheet.ciiva.com/7992/1882059-7992894.pdf?src-supplier=Element14, Contact Plating=Gold, Height=1mm, Lead Free="Lead Free", Length=2.15mm, Manufacturer 2="Texas Instruments", Min Output Voltage=1.8V, Nominal Output Voltage=1.8V, Number of Outputs=1, Number of Pins=5, Number of Regulators=1, Output Current=200mA, Output Type=Fixed, Output Voltage=1.8V, Packaging="Tape and Reel", Polarity=Positive, Power Dissipation=320mW, Power Rating=320mW, Pricing 1="1=0.48000, 10=0.40900, 100=0.30570, 500=0.24020, 1000=0.18561 (USD)", Pricing 2="1=0.55000, 10=0.46700, 100=0.34900 (USD)", Radiation Hardening=No, REACH SVHC="No SVHC", RoHS=Yes, Stock 1=63905, Stock 2=13188, Supplier 1=Digi-Key, Supplier 2=Digi-Key, Supplier Part Number 2=296-25269-1-ND, Width=1.4mm
U3: "IC REG LINEAR 2.8V 200MA SC70-5 Linear Voltage Regulator IC  1 Output  200mA SC-70-5", Case/Package=SC, Dropout Voltage=175mV, Manufacturer 1="Texas Instruments", Manufacturer Part Number 1=TLV70028DCKT, Manufacturer Part Number 2=TLV70028DCKR, Max Input Voltage=5.5V, Max Operating Temperature=125°C, Max Output Current=200mA, Max Output Voltage=2.8V, Max Power Dissipation=320mW, Min Current Limit=220mA, Min Input Voltage=2V, Min Operating Temperature=-40°C, Nominal Supply Current=31uA, Output Voltage Accuracy=2%, Package Quantity=1, Quiescent Current=30uA, Supplier Part Number 1=296-39279-1-ND, Accuracy=2%, ComponentLink1Description=https://datasheet.ciiva.com/14149/tlv700-eng-ds-14149840.pdf?src-supplier=Distrelec, ComponentLink1URL=https://datasheet.ciiva.com/14149/tlv700-eng-ds-14149840.pdf?src-supplier=Distrelec, ComponentLink2Description=https://datasheet.ciiva.com/22700/1882059-22700172.pdf?src-supplier=Element14, ComponentLink2URL=https://datasheet.ciiva.com/22700/1882059-22700172.pdf?src-supplier=Element14, ComponentLink3Description=http://components.arrow.com/part/dataview/0323_00585634?src-supplier=Arrow+Europe, ComponentLink3URL=http://components.arrow.com/part/dataview/0323_00585634?src-supplier=Arrow+Europe, ComponentLink4Description=http://focus.ti.com/lit/ds/symlink/tlv70033.pdf?src-supplier=Avnet+Europe, ComponentLink4URL=http://focus.ti.com/lit/ds/symlink/tlv70033.pdf?src-supplier=Avnet+Europe, ComponentLink5Description=http://www.ti.com/lit/ds/slvsa00d/slvsa00d.pdf?src-supplier=Digi-Key, ComponentLink5URL=http://www.ti.com/lit/ds/slvsa00d/slvsa00d.pdf?src-supplier=Digi-Key, ComponentLink6Description=http://www.ti.com/lit/pdf/slyy050?src-supplier=Digi-Key, ComponentLink6URL=http://www.ti.com/lit/pdf/slyy050?src-supplier=Digi-Key, ComponentLink7Description=http://www.ti.com/general/docs/lit/getliterature.tsp?genericPartNumber=TLV700&&fileType=pdf&src-supplier=Avnet+Asia, ComponentLink7URL=http://www.ti.com/general/docs/lit/getliterature.tsp?genericPartNumber=TLV700&&fileType=pdf&src-supplier=Avnet+Asia, ComponentLink8Description=http://www.ti.com/general/docs/lit/getliterature.tsp?genericPartNumber=TLV700&&fileType=pdf&src-supplier=Avnet, ComponentLink8URL=http://www.ti.com/general/docs/lit/getliterature.tsp?genericPartNumber=TLV700&&fileType=pdf&src-supplier=Avnet, ComponentLink9Description=http://components.arrow.com/part/dataview/48329233S8322732N7713?src-supplier=Arrow, ComponentLink9URL=http://components.arrow.com/part/dataview/48329233S8322732N7713?src-supplier=Arrow, ComponentLink10Description=http://www.ti.com/litv/slvsa00d?src-supplier=Mouser, ComponentLink10URL=http://www.ti.com/litv/slvsa00d?src-supplier=Mouser, ComponentLink11Description=http://www.ti.com/lit/ds/slvsa00e/slvsa00e.pdf?src-supplier=Digi-Key, ComponentLink11URL=http://www.ti.com/lit/ds/slvsa00e/slvsa00e.pdf?src-supplier=Digi-Key, Contact Plating=Gold, Height=1mm, Lead Free="Lead Free", Length=2.15mm, Manufacturer 2="Texas Instruments", Max Supply Voltage=5.5V, Min Output Voltage=2.8V, Min Supply Voltage=2V, Nominal Output Voltage=2.8V, Number of Outputs=1, Number of Pins=5, Number of Regulators=1, Output Current=200mA, Output Type=Fixed, Output Voltage=2.8V, Packaging="Tape and Reel", Polarity=Positive, Power Dissipation=320mW, Power Rating=320mW, Pricing 1="1=0.55000, 10=0.46700, 100=0.34900 (USD)", Pricing 2="1=0.48000, 10=0.40900, 100=0.30570, 500=0.24020, 1000=0.18561 (USD)", Radiation Hardening=No, REACH SVHC="No SVHC", RoHS=Yes, Stock 1=832, Stock 2=30013, Supplier 1=Digi-Key, Supplier 2=Digi-Key, Supplier Part Number 2=296-25271-1-ND, Termination=SMD/SMT, Width=1.4mm

## Via types
v1: diameter 0.41, hole 0.2, Top Copper to Bottom Layer, tented both sides, 49 vias
v2: diameter 0.51, hole 0.25, Top Copper to Bottom Layer, tented both sides, 18 vias
v3: diameter 0.508, hole 0.254, Top Copper to Bottom Layer, tented both sides, 4 vias

## Nets (pads, with @x,y where several pads share a name; then routed paths per layer and width w, separated by ;. In a path a pad name is that pad's centre, name@x,y a point inside that pad or via, vN(x,y) a via of type N, cw(c..) or ccw(c..) an arc to the next point about the centre after c; other vN are vias at no path point)
1.2V: C19.2 FB1.1 U1.5 | length 4.8
  Top Copper w0.381: U1.5 -8.595,-15.652 -8.585,-15.662 -8.585,-16.072 -8.064,-16.593 -7.587,-16.593 C19.2 -7.426,-16.754 -7.426,-17.594 -7.1,-17.92 FB1.1
1.8V: C22.2 FB2.1 U2.5 | length 5.7
  Top Copper w0.14: -7.795,-21.701 -7.754,-21.66
  Top Copper w0.381: U2.5 -8.861,-19.634 -8.2,-19.634 ; C22.2 -8.242,-19.592 -8.2,-19.634 ; FB2.1@-6.582,-21.977 FB2.1 -6.75,-21.66 -7.754,-21.66 -8.022,-21.393 -8.022,-19.813 -8.2,-19.634
2.8V: C25.2 FB3.1 U3.5 | length 3.1
  Top Copper w0.381: FB3.1 7.538,-22.91 7.538,-22.37 7.811,-22.097 7.811,-21.747 C25.2 7.915,-21.612 7.915,-20.237 U3.5
3V3: C18.2 C21.2 C24.2 J1.1 J1.2 U1.1 U1.3 U2.1 U2.3 U3.1 U3.3 | length 18.6
  Top Copper w0.254: v3(-6.769,-25.901) -6.759,-25.901 -6.356,-26.303 -6.273,-26.303 -6.25,-26.326 J1.1 ; v3(-6.296,-28.337) -6.296,-28.295 -6.233,-28.231 J1.1@-6.233,-26.981 ; J1.2@-5.771,-27.04 v3@-5.771,-25.76 ; J1.2@-5.738,-26.976 -5.738,-28.28 -5.703,-28.316 v3(-5.703,-28.358)
  Top Copper w0.3: v3@-5.771,-25.76 v3@-5.771,-25.704
  Top Copper w0.381: C21.2 -11.315,-18.451 -10.776,-18.99 -10.776,-19.05 -10.834,-19.108 -10.834,-19.616 -10.844,-19.625 U2.1@-11.3,-19.625 ; U2.1@-11.309,-19.634 -11.547,-19.634 -11.811,-19.898 -11.811,-20.689 -11.575,-20.925 U2.3 ; U1.3 -11.054,-16.943 -11.579,-16.943 -11.807,-16.715 -11.807,-15.885 -11.584,-15.662 -11.054,-15.662 U1.1 -10.795,-15.652 -10.785,-15.643 v2(-10.785,-15.168) -10.785,-14.698 -10.764,-14.677 -10.764,-14.474 C18.2@-10.645,-14.355 ; U3.3 6.614,-18.018 6.614,-17.501 6.828,-17.287 7.672,-17.287 7.896,-17.51 U3.1@7.896,-18.018 ; U3.1 U3.1@7.896,-18.018 ; v2(9.86,-18.545) C24.2 8.693,-18.018 U3.1@7.896,-18.018
  other v2: -10.776,-19.015
  other v3: -5.768,-25.802
C_1.2V: C1.2 C2.2 FB1.2 J2.2 TP7.1 | length 10.4
  Top Copper w0.22: J2.2 -1.8,-19.158 -1.222,-18.58 C1.2 -1.162,-18.54 -1.162,-17.423 C2.2
  Top Copper w0.381: v1(-6.839,-16.307) -5.972,-16.307 FB1.2 -1.538,-16.02 -1.122,-16.435 C2.2
  Bottom Layer w0.381: TP7.1 -7.443,-16.307 v1(-6.839,-16.307)
C_1.8V: C3.2 C4.2 FB2.2 J2.1 TP8.1 | length 8.3
  Top Copper w0.2: C4.2 -3.432,-18.56 C3.2 -2.33,-19.045 -2.2,-19.175 J2.1
  Top Copper w0.381: v1(-7.526,-20.258) -6.763,-20.258 FB2.2 -5.035,-20.003 C4.2
  Bottom Layer w0.2: v1(-7.526,-20.258) -7.491,-20.293 -7.491,-21.241 TP8.1
C_2.8V: C5.2 C6.2 FB3.2 J2.16 TP9.1 | length 18.4
  Top Copper w0.2: C6.2@-1.444,-24.65 -0.265,-24.65 -0.2,-24.585 -0.2,-24.042 -0.083,-23.925 0.758,-23.925 1,-23.683 J2.16
  Top Copper w0.381: v2(-1.451,-25.374) -1.441,-25.364 -1.441,-24.808 C6.2@-1.452,-24.797 ; v2(7.09,-26.608) 7.09,-26.573 7.328,-26.335 7.328,-25.02 FB3.2
  Layer 1 w0.381: v2(-1.451,-25.374) -1.445,-25.381 -1.445,-25.775 -0.276,-26.943 6.72,-26.943 7.055,-26.608 v2(7.09,-26.608)
  Bottom Layer w0.381: v2(7.09,-26.608) 7.125,-26.608 7.355,-26.838 7.5,-26.838 TP9.1
CAM1_C_N: D2.1 D2.10 J1.19 J2.11 | length 11.8
  Top Copper w0.127: J2.11 1.8,-19.6 1.714,-19.514 1.714,-19.304 1.715,-18.83 1.856,-18.689 v1(1.856,-18.614) ; J1.19 2.75,-25.736 2.824,-25.662 2.876,-25.662 2.913,-25.625 2.913,-25.26 2.876,-25.223 2.851,-25.223 2.777,-25.149 2.777,-24.901 2.851,-24.827 2.876,-24.827 2.913,-24.79 D2.1 2.913,-24.425 2.876,-24.388 2.851,-24.388 2.777,-24.314 2.777,-23.176 2.95,-23.003 2.95,-22.878 3.165,-22.662 v1(3.165,-22.587)
  Bottom Layer w0.127: v1(1.856,-18.614) 1.856,-18.689 1.715,-18.83 1.715,-19.902 ccw(c1.971,-19.799) 1.857,-20.05 cw(c1.832,-20.392) 2.175,-20.392 2.175,-20.62 cw(c1.832,-20.62) 1.861,-20.962 ccw(c1.991,-21.205) 1.715,-21.205 1.715,-21.602 1.825,-21.712 1.936,-21.822 2.75,-21.822 2.892,-21.964 3.025,-22.097 3.025,-22.371 3.165,-22.512 v1(3.165,-22.587)
CAM1_C_P: D2.2 D2.9 J1.18 J2.10 | length 11.7
  Top Copper w0.127: v1(1.346,-18.614) 1.346,-18.689 1.486,-18.83 1.486,-19.209 ; J2.10 1.4,-19.6 1.486,-19.514 1.486,-19.21 ; J1.18 2.336,-26.89 2.336,-26.072 2.5,-25.908 2.5,-25.712 2.413,-25.625 2.413,-25.26 2.449,-25.223 2.474,-25.223 2.548,-25.149 2.548,-24.901 2.474,-24.827 2.449,-24.827 2.413,-24.79 D2.2 2.413,-24.425 2.449,-24.388 2.474,-24.388 2.548,-24.314 2.548,-23.081 2.721,-22.908 2.721,-22.803 2.71,-22.791 2.71,-22.641 v1(2.655,-22.587)
  Bottom Layer w0.127: v1(1.346,-18.614) 1.346,-18.689 1.486,-18.83 1.486,-19.921 ccw(c1.601,-19.922) 1.492,-19.957 ccw(c1.971,-19.799) 1.792,-20.27 ccw(c1.832,-20.163) 1.833,-20.278 cw(c1.832,-20.392) 1.946,-20.392 1.946,-20.62 cw(c1.832,-20.62) 1.832,-20.735 ccw(c1.832,-20.849) 1.785,-20.745 ccw(c1.991,-21.205) 1.486,-21.205 1.486,-21.696 1.642,-21.852 1.776,-21.985 1.841,-22.051 2.656,-22.051 2.796,-22.191 2.796,-22.371 2.655,-22.512 v1(2.655,-22.587)
CAM1_D0_N: D1.1 D1.10 J1.25 J2.8 | length 11.7
  Top Copper w0.127: J2.8 0.6,-20.1 0.514,-20.186 0.514,-20.378 0.674,-20.538 4.178,-20.538 5.614,-21.975 5.614,-24.314 5.689,-24.388 5.714,-24.388 5.75,-24.425 D1.1 5.75,-24.79 5.714,-24.827 5.689,-24.827 5.614,-24.901 5.614,-25.149 5.689,-25.223 5.714,-25.223 5.75,-25.26 D1.10 5.75,-25.625 5.714,-25.662 5.689,-25.662 5.614,-25.736 5.614,-26.19 5.75,-26.326 J1.25
CAM1_D0_P: D1.2 D1.9 J1.24 J2.7 | length 11.7
  Top Copper w0.127: J2.7 0.2,-20.1 0.286,-20.186 0.286,-20.473 0.58,-20.767 4.083,-20.767 5.386,-22.069 5.386,-24.314 5.311,-24.388 5.287,-24.388 5.25,-24.425 D1.2 5.25,-24.79 5.287,-24.827 5.311,-24.827 5.386,-24.901 5.386,-25.149 5.311,-25.223 5.287,-25.223 5.25,-25.26 D1.9 5.25,-25.625 5.287,-25.662 5.311,-25.662 5.386,-25.736 5.386,-26.19 5.25,-26.326 J1.24
CAM1_D1_N: D1.4 D1.7 J1.22 J2.5 | length 11.7
  Top Copper w0.127: J2.5 -0.6,-20.1 -0.686,-20.186 -0.686,-20.953 -0.248,-21.39 3.546,-21.39 4.114,-21.958 4.114,-24.314 4.189,-24.388 4.214,-24.388 4.25,-24.425 D1.4 4.25,-24.79 4.214,-24.827 4.189,-24.827 4.114,-24.901 4.114,-25.149 4.189,-25.223 4.214,-25.223 4.25,-25.26 D1.7 4.25,-25.625 4.214,-25.662 4.189,-25.662 4.114,-25.736 4.114,-25.985 4.114,-26.19 4.25,-26.326 J1.22
CAM1_D1_P: D1.5 D1.6 J1.21 J2.4 | length 11.7
  Top Copper w0.127: J2.4 -1,-20.1 -0.914,-20.186 -0.914,-21.048 -0.343,-21.619 3.452,-21.619 3.886,-22.053 3.886,-24.314 3.811,-24.388 3.786,-24.388 3.75,-24.425 D1.5 3.75,-24.79 3.786,-24.827 3.811,-24.827 3.886,-24.901 3.886,-25.149 3.811,-25.223 3.786,-25.223 3.75,-25.26 D1.6 3.75,-25.625 3.786,-25.662 3.811,-25.662 3.886,-25.736 3.886,-25.891 3.886,-26.19 3.75,-26.326 J1.21
CAM_CLK: D2.5 D2.6 J1.9 J2.24 TP5.1 | length 16.9
  Top Copper w0.102: v1(-2.589,-23.198) -2.578,-23.187 -2.224,-23.187 -2.2,-23.211 J2.24 ; v1(0.374,-24.331) 0.754,-24.331 0.913,-24.49 0.913,-25.625 0.757,-25.78 -2.007,-25.78 -2.25,-26.023 J1.9 -2.25,-28.391 -1.674,-28.968 2.101,-28.968 v1(2.5,-29.366)
  Bottom Layer w0.102: v1(-2.589,-23.198) -2.575,-23.213 -1.748,-23.213 -1.335,-23.625 0.126,-23.625 0.374,-23.874 v1(0.374,-24.331) ; TP5.1 v1(2.5,-29.366)
CAM_PWDN: D2.4 D2.7 J1.10 J2.22 R1.1 TP6.1 | length 23.5
  Top Copper w0.102: -5.606,-23.6 R1.1 v1(-5.3,-23.6) ; J2.22 -1.4,-22.87 -1.397,-22.867 v1(-1.397,-22.817) ; v1(1.178,-24.078) 1.2,-24.1 1.2,-24.151 1.363,-24.314 1.363,-24.557 D2.4 D2.7 1.413,-25.728 1.15,-25.991 -1.707,-25.991 -1.75,-26.034 J1.10 -1.75,-28.191 -1.371,-28.57 2.678,-28.57 3.489,-29.381 v1(5,-29.381)
  Bottom Layer w0.102: v1(-5.3,-23.6) -5.275,-23.625 -4.145,-23.625 -3.362,-22.842 -1.422,-22.842 v1(-1.397,-22.817) -0.888,-23.325 0.425,-23.325 v1(1.178,-24.078) ; v1(5,-29.381) TP6.1
FSIN: J1.4 R3.2 TP2.1 | length 4.1
  Top Copper w0.102: v1(-5,-29.375) v1(-5,-29.375) -4.75,-29.123 J1.4 R3.2
GND: C1.1 C2.1 C3.1 C4.1 C5.1 C6.1 C18.1 C19.1 C21.1 C22.1 C24.1 C25.1 D1.3 D1.8 D2.3 D2.8 J1.5 J1.8 J1.11 J1.17 J1.20 J1.23 J1.26 J1.MP1 J1.MP2 J2.3 J2.6 J2.9 J2.12 J2.13 J2.15 J2.17 J2.19 J2.23 R1.2 TP10.1 TP11.1 TP12.1 TP13.1 U1.2 U2.2 U3.2 | length 40.3
  Top Copper w0.102: J1.5@-4.245,-26.558 v1@-4.245,-26.028 ; J1.8@-2.746,-26.558 -2.745,-26.557 -2.745,-25.931 v1(-2.739,-25.926) ; J2.23 -1.793,-23.407 v1(-1.793,-24.059) ; v1@-1.4,-20.38 J2.3 ; v1@-1.245,-27.919 J1.11@-1.245,-27.389 ; v1(-0.41,-22.483) -0.41,-22.5 -0.41,-22.653 -0.197,-22.867 -0.2,-22.87 J2.19 ; v1@-0.2,-20.38 J2.6 ; v1(0.558,-22.795) 0.558,-22.864 0.552,-22.869 0.552,-23.066 0.575,-23.089 0.575,-23.375 J2.17 ; v1(0.8,-22.3) 0.8,-22.35 1.098,-22.648 1.098,-22.798 1.376,-23.076 1.376,-23.376 J2.15 ; J2.9 v1@1,-19.32 ; J1.17 1.85,-26.876 1.85,-26.078 1.913,-26.015 v1(1.913,-25.931) D2.8 D2.3 1.927,-24.593 v1@1.927,-24.025 ; v1(2,-24.1) 2,-24.098 v1@1.927,-24.025 ; J2.13@2.2,-23.65 2.2,-23.652 1.927,-23.925 v1@1.927,-24.025 ; J2.12 v1@2.2,-19.32 ; J1.20 3.25,-25.926 v1(3.281,-25.895) ; J1.23 v1(4.75,-25.953) D1.8 D1.3 v1(4.75,-23.953) ; J1.26@6.253,-26.575 v1@6.253,-26.045
  Top Copper w0.2: U1.2 v2(-10.297,-16.303) ; C21.1 -10.36,-18.265 v2(-10.36,-17.6) ; C18.1 v2(-9.097,-14.355) ; v2(-9.725,-18.315) C22.1 ; v1(-7.7,-23.6) R1.2 ; C19.1 v2(-7.467,-15.165) ; C4.1 v2(-3.512,-16.93) ; C3.1 v2(-2.33,-17.322) ; v1(-0.69,-25.386) -0.69,-25.36 -0.688,-25.357 -0.292,-25.357 C5.1@-0.213,-25.278 ; C1.1 v2(0.037,-18.58) ; C2.1 v2(0.392,-17.383)
  Top Copper w0.381: U2.2 v2(-10.28,-20.275) ; v2(-2.907,-24.743) -2.362,-24.743 C6.1 ; C25.1 7.035,-21.622 v2(7.035,-21.053) ; U3.2 7.263,-18.035 v2(7.263,-18.765)
  Top Copper w0.5: -9.912,-29.626 J1.MP1 ; -8.35,-31.188 J1.MP1 ; -8.35,-28.064 J1.MP1 ; -6.788,-29.626 J1.MP1 ; 6.788,-29.626 J1.MP2 ; 8.35,-31.188 J1.MP2 ; 8.35,-28.064 J1.MP2 ; 9.912,-29.626 J1.MP2
  Bottom Layer w0.104: v1(0.8,-22.3) 0.883,-22.3 0.983,-22.4 1.346,-22.4 1.379,-22.367 1.675,-22.367 1.867,-22.559 1.987,-22.559 v1(2.046,-22.617) ; 2.106,-23.384 v1@2.106,-22.506
  other v1: -6.2,-29.9 -1.248,-28.025 6.256,-25.939 -4.241,-25.922 0.411,-25.181 -0.7,-24.1 -2.76,-23.687 3.285,-23.35 -4.8,-23.1 -1.957,-22.481 -1.403,-20.486 -0.203,-20.486 1.003,-19.214 2.203,-19.214 0.778,-18.162 2.4,-18.162
I2C_SCL: J1.7 J2.21 TP4.1 | length 12.8
  Top Copper w0.102: J2.21 -1,-23.025 -0.914,-22.939 -0.914,-22.781 -1.569,-22.125 -2.564,-22.125 -3.356,-22.918 -3.356,-26.02 -3.25,-26.126 J1.7 -3.25,-28.303 -2.882,-28.67 -2.601,-28.67 -1.896,-29.375 v1(0,-29.375)
I2C_SDA: J1.6 J2.20 TP3.1 | length 11.7
  Top Copper w0.102: v1(-2.5,-29.375) -2.93,-29.375 -3.75,-28.555 J1.6 -3.75,-26.126 -3.6,-25.976 -3.6,-22.876 -2.624,-21.9 -1.496,-21.9 -0.6,-22.796 J2.20
NetJ2_18: J2.18 R3.1 | length 7.8
  Top Copper w0.102: R3.1 -4.75,-23.65 -4.2,-23.1 v1(-4.2,-22.7) ; v1(0.1,-22.5) 0.1,-22.839 0.225,-22.964 0.225,-23.509 J2.18@0.175,-23.559
  Bottom Layer w0.102: v1(-4.2,-22.7) -4.12,-22.7 -3.545,-22.125 -0.245,-22.125 0.1,-22.471 v1(0.1,-22.5)
STROBE: J1.3 J2.14 TP1.1 | length 16.8
  Top Copper w0.102: v1(-6.106,-29.254) -6.068,-29.216 -5.843,-29.216 -5.25,-28.622 J1.3 ; v1(1.527,-22.724) 1.568,-22.765 1.568,-22.918 1.8,-23.15 J2.14
  Bottom Layer w0.102: TP1.1 -7.405,-29.28 -6.132,-29.28 -6.087,-29.235 -5.794,-29.235 -5.005,-28.446 -5.005,-27.688 -2.142,-24.825 1.012,-24.825 1.587,-24.25 1.587,-22.963 1.56,-22.936 1.56,-22.757 v1(1.527,-22.724)
pads on no net: FID1.1 FID2.1 FID3.1 FID4.1 J1.12 J1.13 J1.14 J1.15 J1.16 MTG1.1 MTG2.1 MTG3.1 MTG4.1 U1.4 U2.4 U3.4

## Polygon pours and split planes (outlines as drawn)
GND on Top Copper "GND_L01_P046" (solid, remove dead copper, pour order 46): -12.5,-30.956 ccw(c-10.5,-30.956) -10.5,-32.956 10.5,-32.956 ccw(c10.5,-30.956) 12.5,-30.956 12.5,-11.1 12.5,-11.094 ccw(c10.5,-11.094) 10.5,-9.094 8.745,-9.094 8.75,-9.094 ccw(c8.75,-11.094) 6.75,-11.094 6.75,-12.49 cw(c4.75,-12.49) 4.75,-14.49 -4.75,-14.49 cw(c-4.75,-12.49) -6.75,-12.49 -6.75,-11.094 ccw(c-8.75,-11.094) -8.75,-9.094 -8.745,-9.094 -10.5,-9.094 ccw(c-10.5,-11.094) -12.5,-11.094
no net on Top Copper "MLGNDBRD" (solid, pour order 41): 7.75,-32.275
GND on Layer 1 "GND_L03_P044" (solid, remove dead copper, pour order 44): -12.5,-30.956 ccw(c-10.5,-30.956) -10.5,-32.956 10.5,-32.956 ccw(c10.5,-30.956) 12.5,-30.956 12.5,-11.1 12.5,-11.094 ccw(c10.5,-11.094) 10.5,-9.094 8.745,-9.094 8.75,-9.094 ccw(c8.75,-11.094) 6.75,-11.094 6.75,-12.49 cw(c4.75,-12.49) 4.75,-14.49 -4.75,-14.49 cw(c-4.75,-12.49) -6.75,-12.49 -6.75,-11.094 ccw(c-8.75,-11.094) -8.75,-9.094 -8.745,-9.094 -10.5,-9.094 ccw(c-10.5,-11.094) -12.5,-11.094
3V3 on Layer 1 "3V3_L03_P042" (solid, remove dead copper, pour order 42): -7.792,-21.589 -7.792,-15.665 -8.967,-14.49 -10.825,-14.49 -11.254,-14.919 -11.254,-24.228 -4.948,-30.534 6.953,-30.534 9.052,-28.434 9.052,-21.969 10.422,-20.599 10.422,-17.82 10.02,-17.418 7.72,-17.418 7.211,-17.926 7.211,-25.706 5.8,-27.117 -2.264,-27.118
GND on Bottom Layer "GND_L04_P043" (solid, remove dead copper, pour order 43): -12.5,-30.956 ccw(c-10.5,-30.956) -10.5,-32.956 10.5,-32.956 ccw(c10.5,-30.956) 12.5,-30.956 12.5,-11.1 12.5,-11.094 ccw(c10.5,-11.094) 10.5,-9.094 8.745,-9.094 8.75,-9.094 ccw(c8.75,-11.094) 6.75,-11.094 6.75,-12.49 cw(c4.75,-12.49) 4.75,-14.49 -4.75,-14.49 cw(c-4.75,-12.49) -6.75,-12.49 -6.75,-11.094 ccw(c-8.75,-11.094) -8.75,-9.094 -8.745,-9.094 -10.5,-9.094 ccw(c-10.5,-11.094) -12.5,-11.094
GND on Signal Layer 1 "GND_L02_P045" (solid, remove dead copper, pour order 45): -12.5,-30.956 ccw(c-10.5,-30.956) -10.5,-32.956 10.5,-32.956 ccw(c10.5,-30.956) 12.5,-30.956 12.5,-11.1 12.5,-11.094 ccw(c10.5,-11.094) 10.5,-9.094 8.745,-9.094 8.75,-9.094 ccw(c8.75,-11.094) 6.75,-11.094 6.75,-12.49 cw(c4.75,-12.49) 4.75,-14.49 -4.75,-14.49 cw(c-4.75,-12.49) -6.75,-12.49 -6.75,-11.094 ccw(c-8.75,-11.094) -8.75,-9.094 -8.745,-9.094 -10.5,-9.094 ccw(c-10.5,-11.094) -12.5,-11.094

## Keep-outs
Keep-Out Layer:
  circle w0.254: c10.5,-11.125 r1.778
  circle w0.254: c-10.5,-23.625 r1.778
  circle w0.254: c-10.5,-11.125 r1.778
  circle w0.254: c10.5,-23.625 r1.778
  lines w0.762: -8.75,-9.094 cw(c-8.75,-11.094) -6.75,-11.094 -6.75,-12.49 ccw(c-4.75,-12.49) -4.75,-14.49 4.75,-14.49 ccw(c4.75,-12.49) 6.75,-12.49 6.75,-11.094 cw(c8.75,-11.094) 8.75,-9.094 ; -8.745,-9.094 -10.5,-9.094 ccw(c-10.5,-11.094) -12.5,-11.094 -12.5,-30.956 ccw(c-10.5,-30.956) -10.5,-32.956 10.5,-32.956 ccw(c10.5,-30.956) 12.5,-30.956 12.5,-11.1 ; 8.745,-9.094 10.5,-9.094 cw(c10.5,-11.094) 12.5,-11.094

## Other copper
Top Copper:
  region: -0.18,-25.295

## Silkscreen, mask and mechanical layers (free items; w line width, h text height)
Top Overlay:
  drawing of 7 lines, arcs and shapes, not listed
  text "BOT" at -12.37,-28.093 h1
Bottom Overlay:
  drawing of 10 lines, arcs and shapes, not listed
  text "1.2V" at -7.701,-14.814 h1.02 r270
  text "Pb" at -8.902,-15.928 h2.34
  text "RoHS" at -8.242,-17.7 h1.4
  text "1.8V" at -7.714,-20.072 h1.02 r270
  text ".REVISION" at -6.522,-22.155 h1.27 r270
  text ".PROJECT_TITLE" at -5.472,-22.155 h1.27 r270
  text "STRB" at -7.783,-28.425 h1.02 r270
  text "FSIN" at -5.321,-28.425 h1.02 r270
  text "PWDN" at 4.731,-28.425 h1.02 r270